# Altium PCB VOLTAGE_MEASURE_DC.PcbDoc
Units mil, origin at the board's own origin, x right, y up, seen from the top; angles counter-clockwise.
Board outline 1915.03 x 1100.03 mil, 2 copper layers (Top Layer, Bottom Layer); 20 components, 15 nets, 96 pads, 0 vias.
Unrouted connection lines stored in the file: 6.
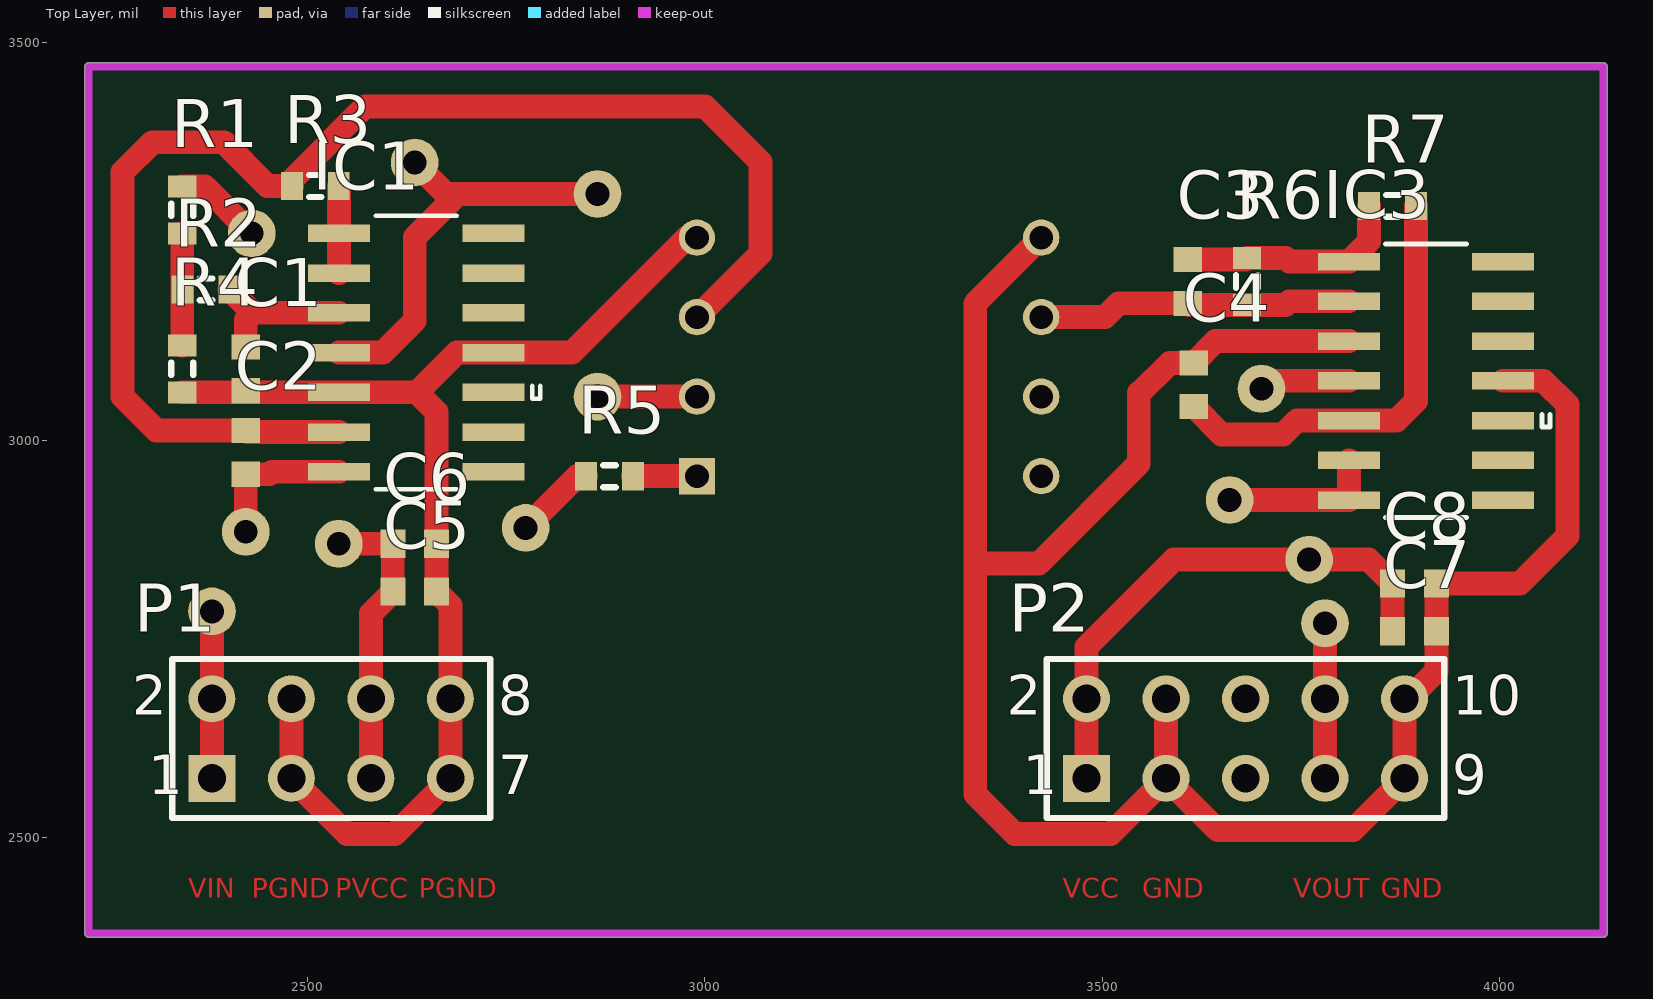
[diagram p0: Top Layer view]
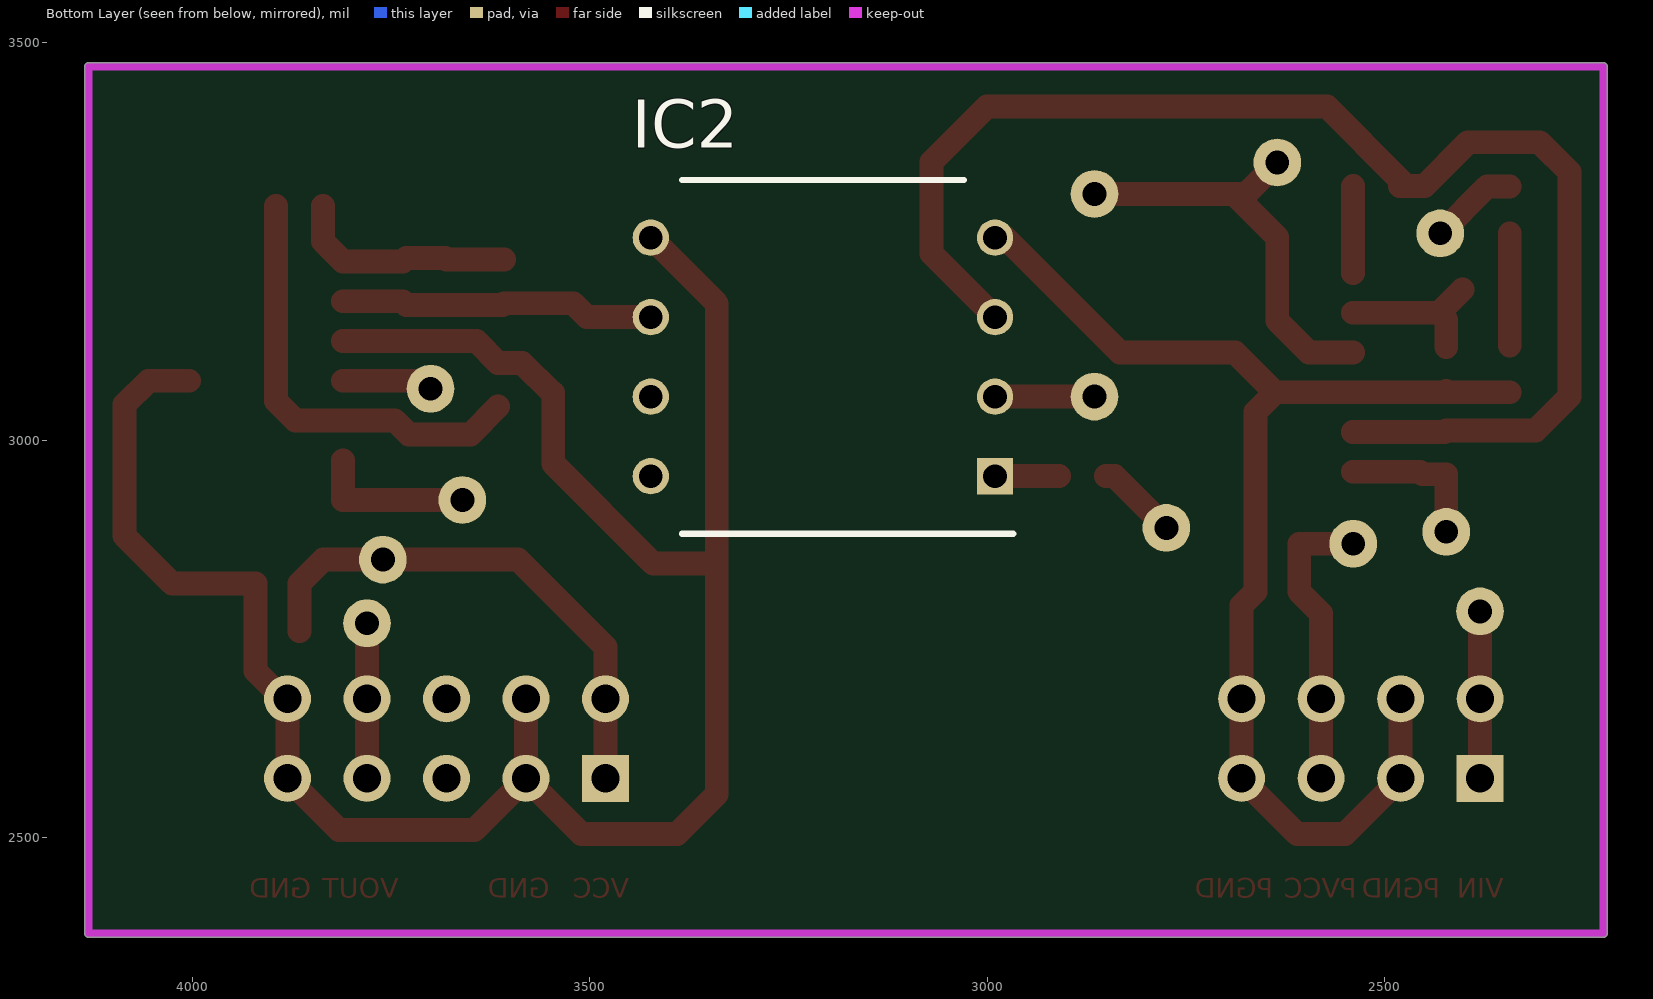
[diagram p1: Bottom Layer view, seen from below]

## Layer stack, top to bottom
Top Solder: solder mask 0.4, Solder Resist, Dk 3.5
Top Layer: signal copper 1.4
Dielectric 1: dielectric 12.6, FR-4, Dk 4.8
Bottom Layer: signal copper 1.4
Bottom Solder: solder mask 0.4, Solder Resist, Dk 3.5

## Board outline
2225,2374.99 cw(c2225,2380) 2219.99,2380 2219.99,3470 cw(c2225,3470) 2225,3475.01 4130,3475.01 cw(c4130,3470) 4135.02,3470 4135.02,2380 cw(c4130,2380) 4130,2374.99

## Design rules (kind name [scope] priority, off if disabled: settings)
Clearance [All] p1: gap=10 ignorepadtopadclearanceinfootprint=FALSE except(0: Arc-Hole Track-Hole SMDPad-Hole THPad-Hole Via-Hole Fill-Hole Poly-Hole Region-Hole Text-Hole)
PolygonConnect [All] p1: connectstyle=Relief reliefconductorwidth=10 reliefentries=4 polygonreliefangle="90 Angle" airgapwidth=10
RoomDefinition VOLTAGE_MEASURE_DC [InComponentClass('VOLTAGE_MEASURE_DC')] p1: confinementstyle=ConfineIn formatcopy=TRUE lockcomponents=FALSE outline 2225,2380 4130,2380 4130,3470 2225,3470
RoutingVias [All] p1: holewidth=28 width=50 viastyle="Through Hole" minholewidth=28 minwidth=50 maxholewidth=28 maxwidth=50
SolderMaskExpansion [All] p1: expansion=4
Width [All] p1: maxlimit=30 minlimit=10 preferedwidth=30 bottomlayer_maxwidth=10 bottomlayer_prefwidth=10 minimp=50.000000 maximp=50.000000 favimp=50.000000
30 further rules are at their usual default settings.

## Components (designator, comment, footprint, x,y, rotation, side; value= is the part's Value field where it differs from the comment)
C1 "Cap" 1608[0603] 2422.56,3090 r90 top value=10nF
C2 "Cap" 1608[0603] 2422.56,2985 r90 top value=10pF
C3 "Cap" 1608[0603] 3607.44,3200 r270 top value=10pF
C4 "Cap" 1608[0603] 3615,3070 r270 top value=10nF
C5 "Cap" 1608[0603] 2635,2810 r0 top value=10uF
C6 "Cap" 1608[0603] 2635,2870 r0 top value=10nF
C7 "Cap" 1608[0603] 3892.56,2760 r0 top value=10uF
C8 "Cap" 1608[0603] 3892.56,2820 r0 top value=10nF
IC1 "TLC274CDR" SOIC127P600X175-14N 2637,3110.47 r0 top
IC2 "HCNR200-000E" DIP1100W56P254L1115H510Q8N 3206.54,3105 r0 bottom
IC3 "TLC274CDR" SOIC127P600X175-14N 3907,3075 r0 top
P1 "Header 4X2" HDR2X4 2380,2575 r0 top
P2 "Header 5X2" HDR2X5 3480,2575 r0 top
R1 "Res1" J1-0603 2342.56,3290 r90 top value=10K
R2 "Res1" J1-0603 2372.56,3190 r0 top value=10K
R3 "Res1" J1-0603 2510,3320 r0 top value=80K
R4 "Res1" J1-0603 2342.56,3090 r90 top value=10K
R5 "Res1" J1-0603 2880,2955 r0 top value=200
R6 "Res1" J1-0603 3681.97,3200 r90 top value=80K
R7 "Res1" J1-0603 3865,3295 r0 top value=10K

## Footprints (in the part's own frame and the unit in brackets; to place one, negate y for a bottom-side part, rotate by r counter-clockwise, add the part's x,y. Pads: shape width x height; smd on the part's side, far side on the other; paste and mask are expansions set on the pad)
1608[0603] [mm] "Chip Capacitor, Body 1.6x0.8mm, IPC High Density"
  rect 0.8x0.9 smd: 1(-0.7,0) 2(0.7,0)
  body extent -0.87,-0.48 0.87,0.48, height 1.3
DIP1100W56P254L1115H510Q8N [mm]
  rect 1.16x1.16 hole 0.76: 1(-5.5,3.81)
  round 1.16 hole 0.76: 2(-5.5,1.27) 3(-5.5,-1.27) 4(-5.5,-3.81) 5(5.5,-3.81) 6(5.5,-1.27) 7(5.5,1.27) 8(5.5,3.81)
  silkscreen extent -6.08,-5.65 4.5,5.65, body extent -5.64,-5.58 5.64,5.57, height 5.1
HDR2X4 [mm] "Connector; Header; 4x2 Position"
  rect 1.5x1.5 hole 0.9: 1(0,0)
  round 1.5 hole 0.9: 2(0,2.54) 3(2.54,0) 4(2.54,2.54) 5(5.08,0) 6(5.08,2.54) 7(7.62,0) 8(7.62,2.54)
  silkscreen extent -1.27,-1.27 8.89,3.81
HDR2X5 [mm] "Connector; Header; 5x2 Position"
  rect 1.5x1.5 hole 0.9: 1(0,0)
  round 1.5 hole 0.9: 2(0,2.54) 3(2.54,0) 4(2.54,2.54) 5(5.08,0) 6(5.08,2.54) 7(7.62,0) 8(7.62,2.54) 9(10.16,0) 10(10.16,2.54)
  silkscreen extent -1.27,-1.27 11.43,3.81
J1-0603 [mm] "Chip Resistor, Body 1.6x0.8mm, IPC High Density"
  rect 0.7x0.9 smd: 1(-0.75,0) 2(0.75,0)
  silkscreen extent -0.2,-0.35 0.2,0.35, body extent -0.85,-0.48 0.85,0.48, height 0.9
SOIC127P600X175-14N [mil]
  rect 78x22 smd: 1(-97,150) 2(-97,100) 3(-97,50) 4(-97,0) 5(-97,-50) 6(-97,-100) 7(-97,-150) 8(97,-150) 9(97,-100) 10(97,-50) 11(97,0) 12(97,50) 13(97,100) 14(97,150)
  silkscreen extent -51,-172 156,172

## Part data
C1 C2 C3 C4 C5 C6 C7 C8: "Capacitor", LatestRevisionDate=17-Jul-2002, LatestRevisionNote="Re-released for DXP Platform.", PackageDescription="Radial Cap, Thru-Hole; 2 Leads; 0.3 in Pin Spacing", PackageReference=RAD-0.3, Published=8-Jun-2000, Publisher="Altium Limited"
IC1 IC3: "Integrated Circuit", Manufacturer_Name="Texas Instruments", Mouser Part Number=595-TLC274CDR, RS Part Number=0527237, Datasheet Link=http://www.ti.com/lit/gpn/tlc274, Manufacturer_Part_Number=TLC274CDR, Mouser Price/Stock=https://www.mouser.com/Search/Refine.aspx?Keyword=595-TLC274CDR, RS Price/Stock=http://uk.rs-online.com/web/p/products/0527237
IC2: "Integrated Circuit", Manufacturer_Name="Avago Technologies", Mouser Part Number=630-HCNR200-000E, RS Part Number=6961248P, Datasheet Link=https://docs.broadcom.com/docs/AV02-0886EN, Height=5.1mm, Manufacturer_Part_Number=HCNR200-000E, Mouser Price/Stock=https://www.mouser.com/Search/Refine.aspx?Keyword=630-HCNR200-000E, RS Price/Stock=http://uk.rs-online.com/web/p/products/6961248P
P1: "Header, 4-Pin, Dual row", LatestRevisionDate=17-Jul-2002, LatestRevisionNote="Re-released for DXP Platform.", Publisher="Altium Limited"
P2: "Header, 5-Pin, Dual row", LatestRevisionDate=17-Jul-2002, LatestRevisionNote="Re-released for DXP Platform.", Publisher="Altium Limited"
R1 R2 R3 R4 R5 R6 R7: "Resistor", LatestRevisionDate=17-Jul-2002, LatestRevisionNote="Re-released for DXP Platform.", PackageDescription="Axial Device, Thru-Hole; 2 Leads; 0.3 in Pin Spacing", PackageReference=AXIAL-0.3, Published=8-Jun-2000, Publisher="Altium Limited"

## Free pads (board coordinates)
  round 60 hole 30: 2(2430,3260.47) 3(2774.53,2890) 3(2865,3055.06) 3(2865,3310) 4(2422.56,2885) 6(3700,3065) 7(3760,2850) 8(2380,2785) 9(3660,2925) 9(3780,2770) 10(2539.53,2870) 10(2635,3349.53)

## Nets (pads, with @x,y where several pads share a name; then routed paths per layer and width w, separated by ;. In a path a pad name is that pad's centre, name@x,y a point inside that pad or via, vN(x,y) a via of type N, cw(c..) or ccw(c..) an arc to the next point about the centre after c; other vN are vias at no path point)
GND: C4.1 C7.2 C8.2 IC2.5 IC3.3 IC3.11 P2.3 P2.4 P2.9 P2.10 | length 2829
  Top Layer w30: IC2.5 3340,3171.93 3340,2845 ; P2.4 P2.3 ; IC3.3 3642.44,3125 C4.1 3585,3097.56 3547.44,3060 3545.63,3060 3545.63,2970.63 3420,2845 3340,2845 ; IC3.11 4055,3075 4085,3045 4085,2880 4025,2820 C8.2 C7.2 3920.12,2710.12 3885,2675 P2.10 P2.9 3815,2510 3645,2510 P2.3 ; 3340,2845 3340,2555 3390,2505 3510,2505 P2.3
NetC1_2: C1.2 IC1.3 R2.2 | length 196.8
  Top Layer w30: R2.2 2431.61,3160.47 ; C1.2 2422.56,3151.42 2431.61,3160.47 ; IC1.3 2431.61,3160.47
NetC2_1: C2.1 IC1.7 pad.3@2774.53,2890 pad.4 R5.1 | length 294
  Top Layer w30: pad.4 C2.1 2452.44,2957.44 2455.47,2960.47 IC1.7 ; pad.3@2774.53,2890 2839.53,2955 R5.1
NetC2_2: C2.2 IC1.6 IC2.3 R3.1 | length 1717.3
  Top Layer w30: IC1.6 2424.65,3010.47 C2.2 2310,3012.56 2267.5,3055.06 2267.5,3337.5 2305,3375 2395,3375 2450,3320 R3.1 2480.47,3327.8 2572.68,3420 3000,3420 3070,3350 3070,3235 IC2.3
NetC3_1: C3.1 IC3.1 R6.2 R7.1 | length 285.8
  Top Layer w30: C3.1 3680,3227.56 R6.2 3730.47,3229.53 3735,3225 IC3.1 3835.47,3250.47 R7.1
NetC3_2: C3.2 IC2.6 IC3.2 R6.1 | length 396.8
  Top Layer w30: IC2.6 3503.07,3155 3520.51,3172.44 C3.2 3609.41,3170.47 R6.1 3730.47,3170.47 3735,3175 IC3.2
NetC4_2: C4.2 IC3.5 R7.2 | length 556.9
  Top Layer w30: C4.2 3650,3007.44 3727.44,3007.44 3745,3025 IC3.5 3870,3025 3894.53,3049.53 R7.2
NetIC1_1: IC1.1 IC1.2 R3.2 | length 109.7
  Top Layer w30: R3.2 2540,3319.53 IC1.1 IC1.2
NetIC2_1: IC2.1 R5.2 | length 80.5
  Top Layer w30: R5.2 IC2.1
NetR1_1: R1.1 R2.1 R4.2 | length 140.9
  Top Layer w30: R4.2 R1.1
PGND: C1.1 C5.2 C6.2 IC1.5 IC1.11 IC2.4 P1.3 P1.4 P1.7 P1.8 R4.1 | length 1590.5
  Top Layer w30: R4.1 2420.59,3060.47 C1.1 2424.53,3060.47 IC1.5 2638.03,3060.47 ; P1.4 P1.3 2550,2505 2610,2505 P1.7 P1.8 2680,2792.56 C5.2 C6.2 2662.56,3035.95 2638.03,3060.47 ; IC2.4 2977.56,3255 2833.03,3110.47 IC1.11 2688.03,3110.47 2638.03,3060.47
PVCC: C5.1 C6.1 IC1.4 IC2.2 P1.5 P1.6 pad.3@2865,3055.06 pad.3@2865,3310 pad.10 | length 1039.4
  Top Layer w30: pad.10@2539.53,2870 C6.1 C5.1 2580,2782.56 P1.6 P1.5 ; IC1.4 2595,3110.47 2635,3150.47 2635,3255.47 2689.53,3310 ; pad.10@2635,3349.53 2674.53,3310 2689.53,3310 ; pad.3@2865,3055.06 2989.94,3055.06 IC2.2 ; pad.3@2865,3310 2689.53,3310
VCC: C7.1 C8.1 IC3.4 P2.1 P2.2 pad.6 pad.7 | length 782.1
  Top Layer w30: P2.1 P2.2 3480,2740 3590,2850 pad.7 3835,2850 C8.1 C7.1 ; pad.6 3710,3075 IC3.4
VIN: P1.1 P1.2 pad.2 pad.8 R1.2 | length 321.9
  Top Layer w30: R1.2 2370.94,3319.53 pad.2 ; P1.1 P1.2 pad.8
VOUT: IC3.6 IC3.7 P2.7 P2.8 pad.9 | length 395
  Top Layer w30: pad.9@3660,2925 IC3.7 IC3.6 ; P2.7 P2.8 pad.9@3780,2770
pads on no net: IC1.8 IC1.9 IC1.10 IC1.12 IC1.13 IC1.14 IC2.7 IC2.8 IC3.8 IC3.9 IC3.10 IC3.12 IC3.13 IC3.14 P2.5 P2.6

## Keep-outs
Keep-Out Layer:
  lines w10: 2225,2380 2225,3470 4130,3470 4130,2380 2225,2380

## Other copper
Top Layer:
  text "VIN" at 2350,2425 h25
  text "PGND" at 2430,2425 h25
  text "PVCC" at 2535,2425 h25
  text "PGND" at 2640,2425 h25
  text "VCC" at 3450,2425 h25
  text "GND" at 3550,2425 h25
  text "VOUT" at 3740,2425 h25
  text "GND" at 3850,2425 h25
  text "VOUT" at 3118.32,1355 h25

## Text inside footprints (layer, text, board x,y; h text height)
P1: Top Overlay "2" at 2280,2655 h50; Top Overlay "1" at 2300,2555 h50; Top Overlay "7" at 2740,2555 h50; Top Overlay "8" at 2740,2655 h50
P2: Top Overlay "10" at 3940,2655 h50; Top Overlay "9" at 3940,2555 h50; Top Overlay "1" at 3400,2555 h50; Top Overlay "2" at 3380,2655 h50